# Altium PCB ch559.PcbDoc
Units mm, origin at the board's own origin, x right, y up, seen from the top; angles counter-clockwise.
Board outline 51.31 x 62.61 mm, 2 copper layers (Top Layer, Bottom Layer); 72 components, 55 nets, 249 pads, 124 vias.
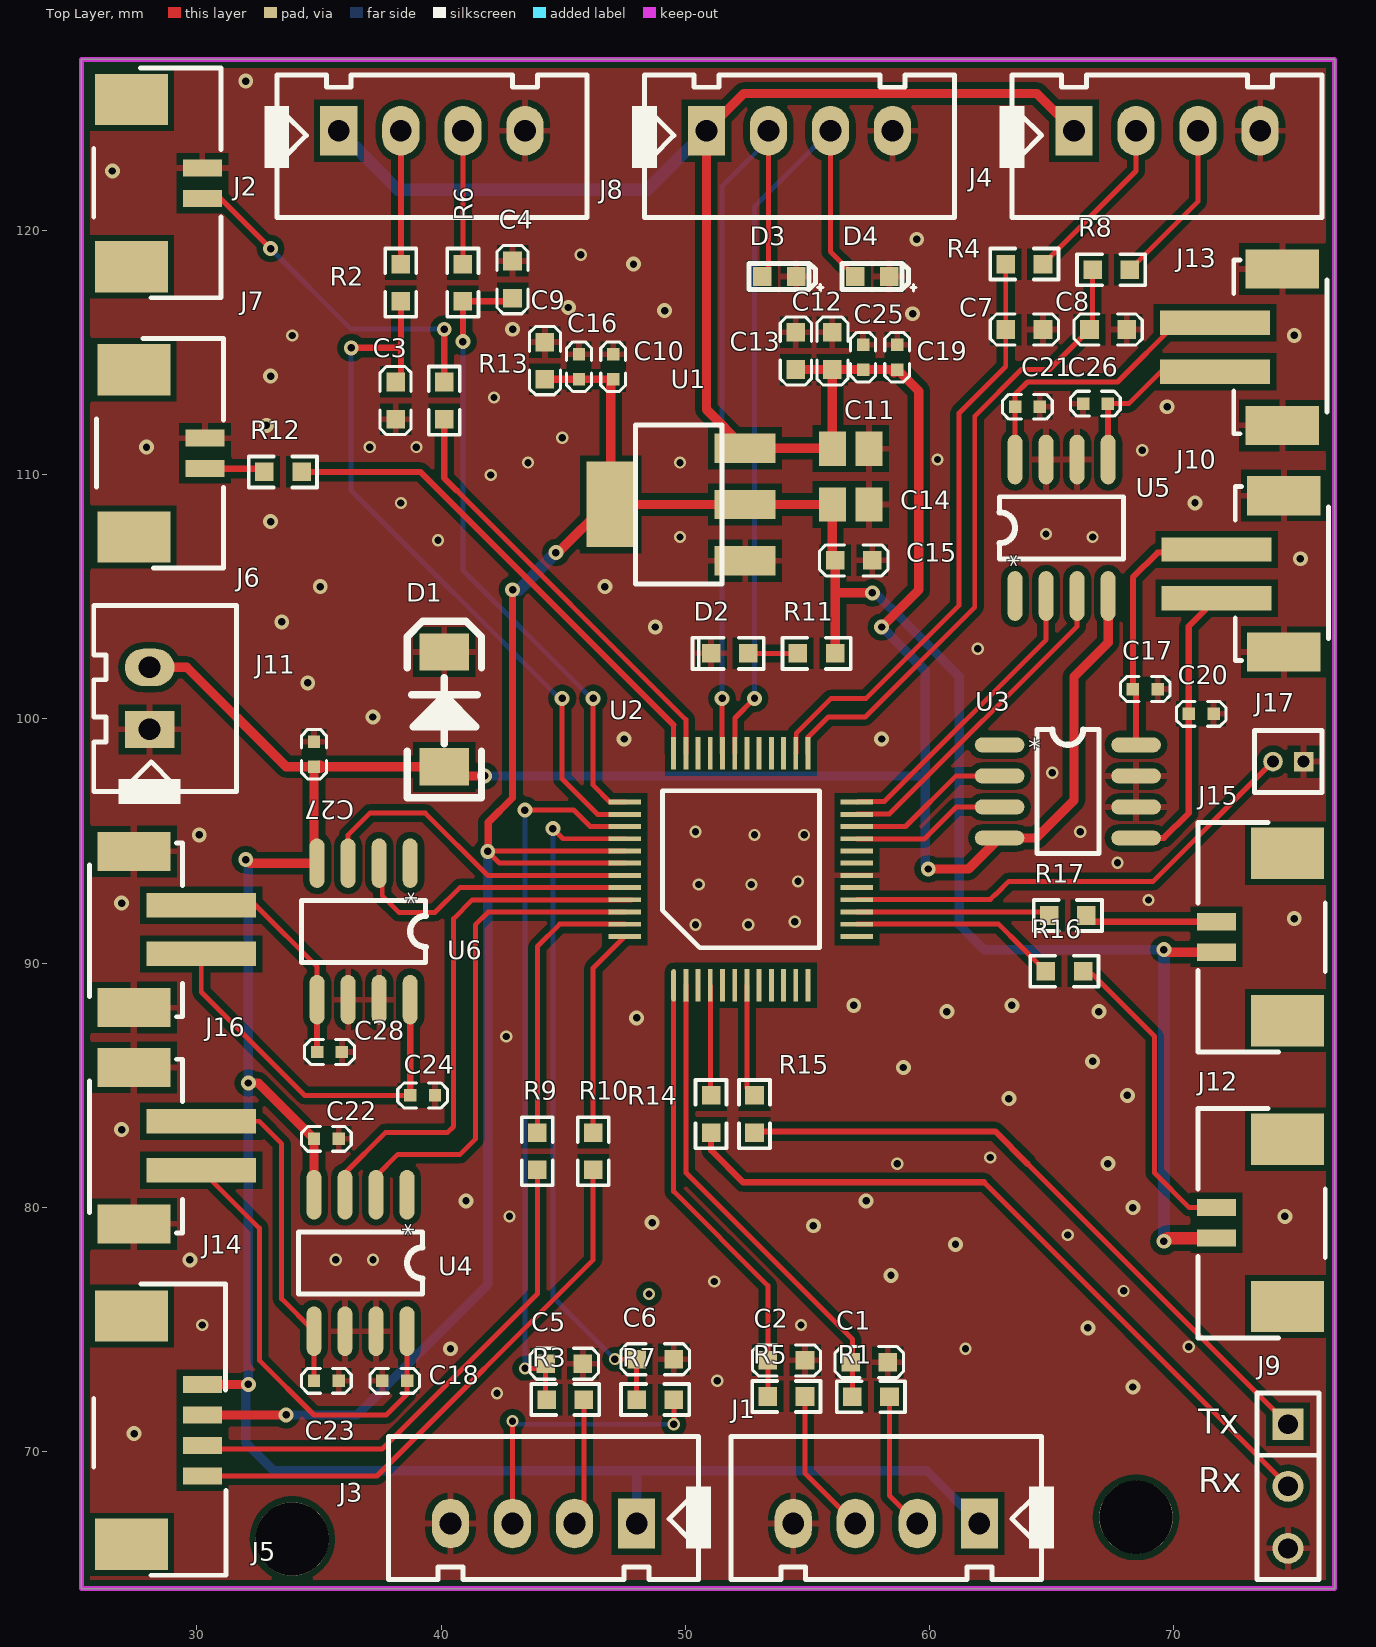
[diagram p0: Top Layer view]
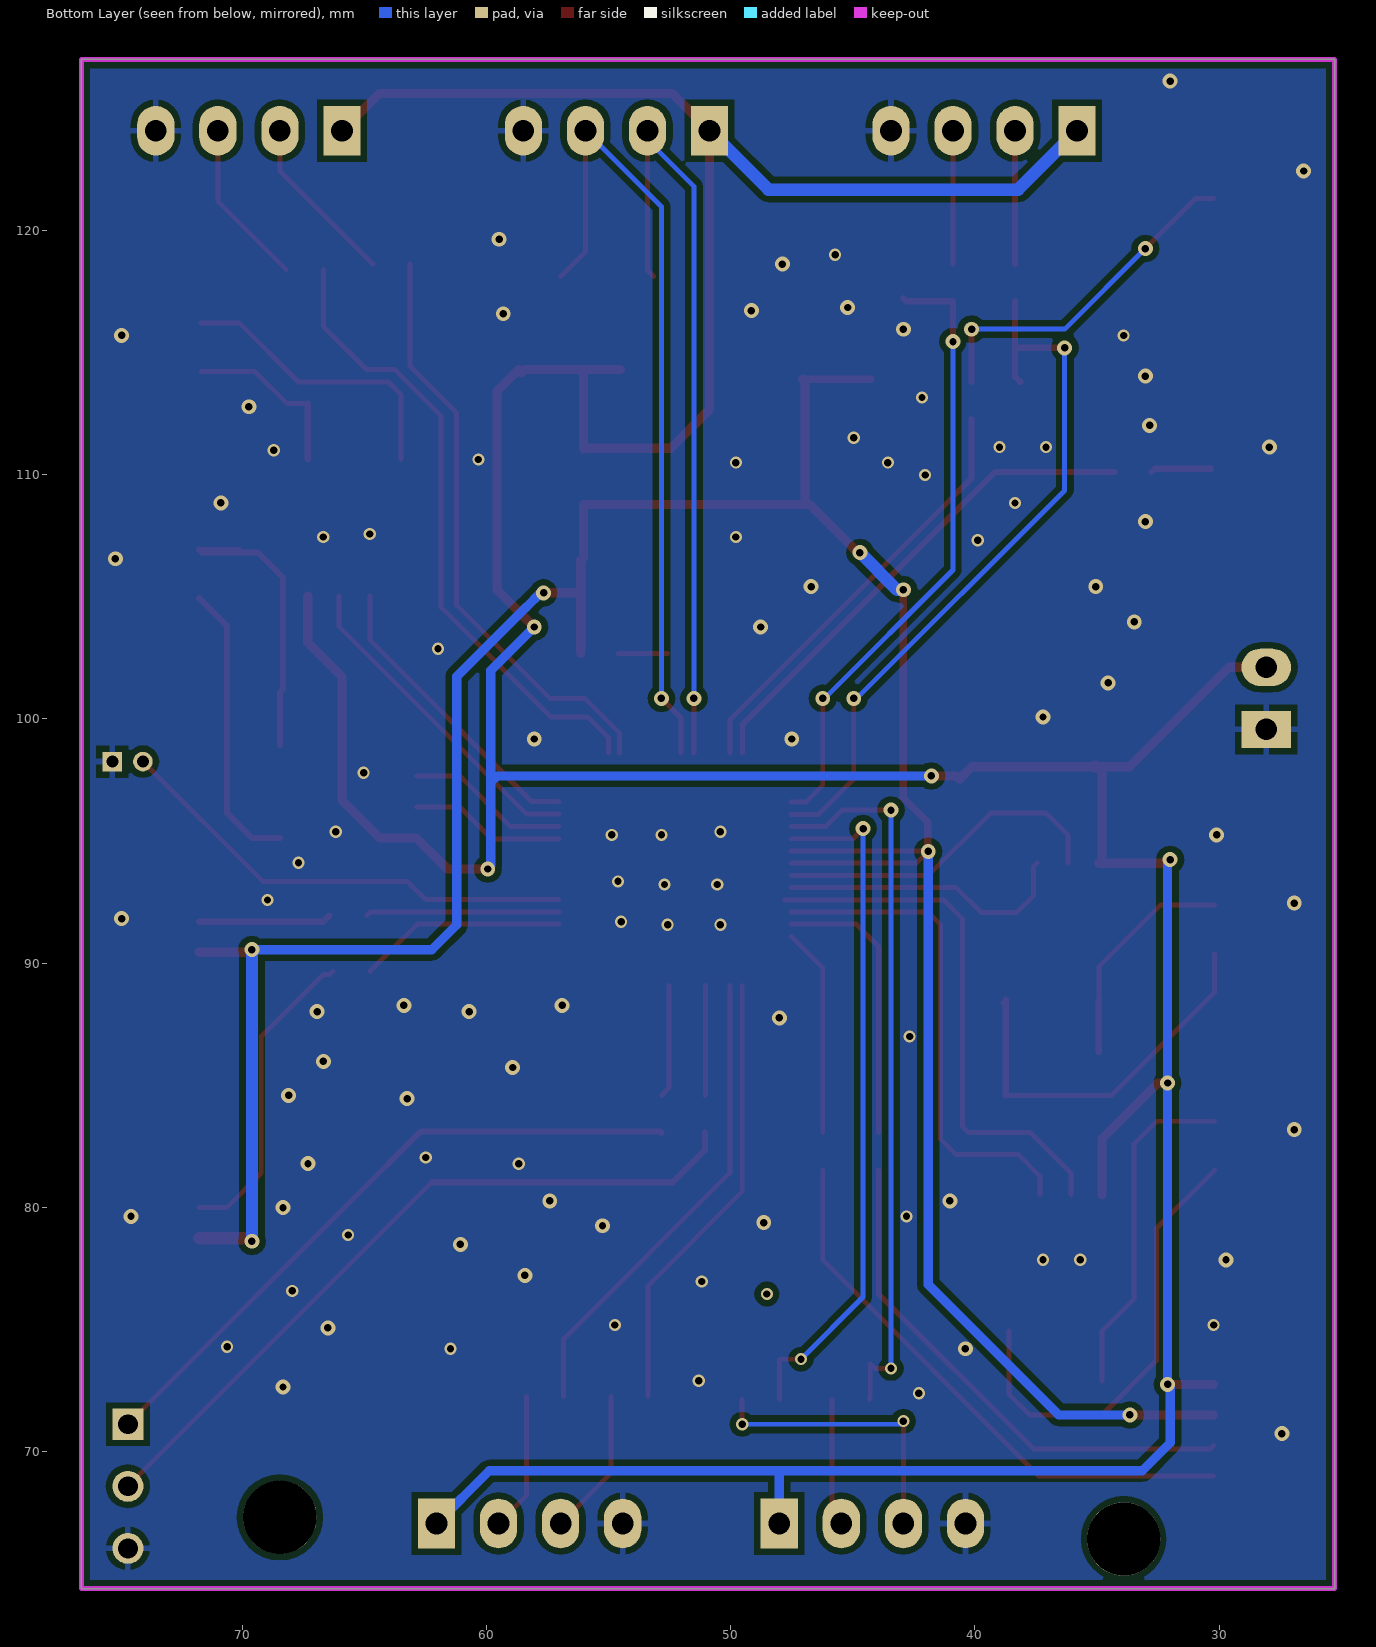
[diagram p1: Bottom Layer view, seen from below]
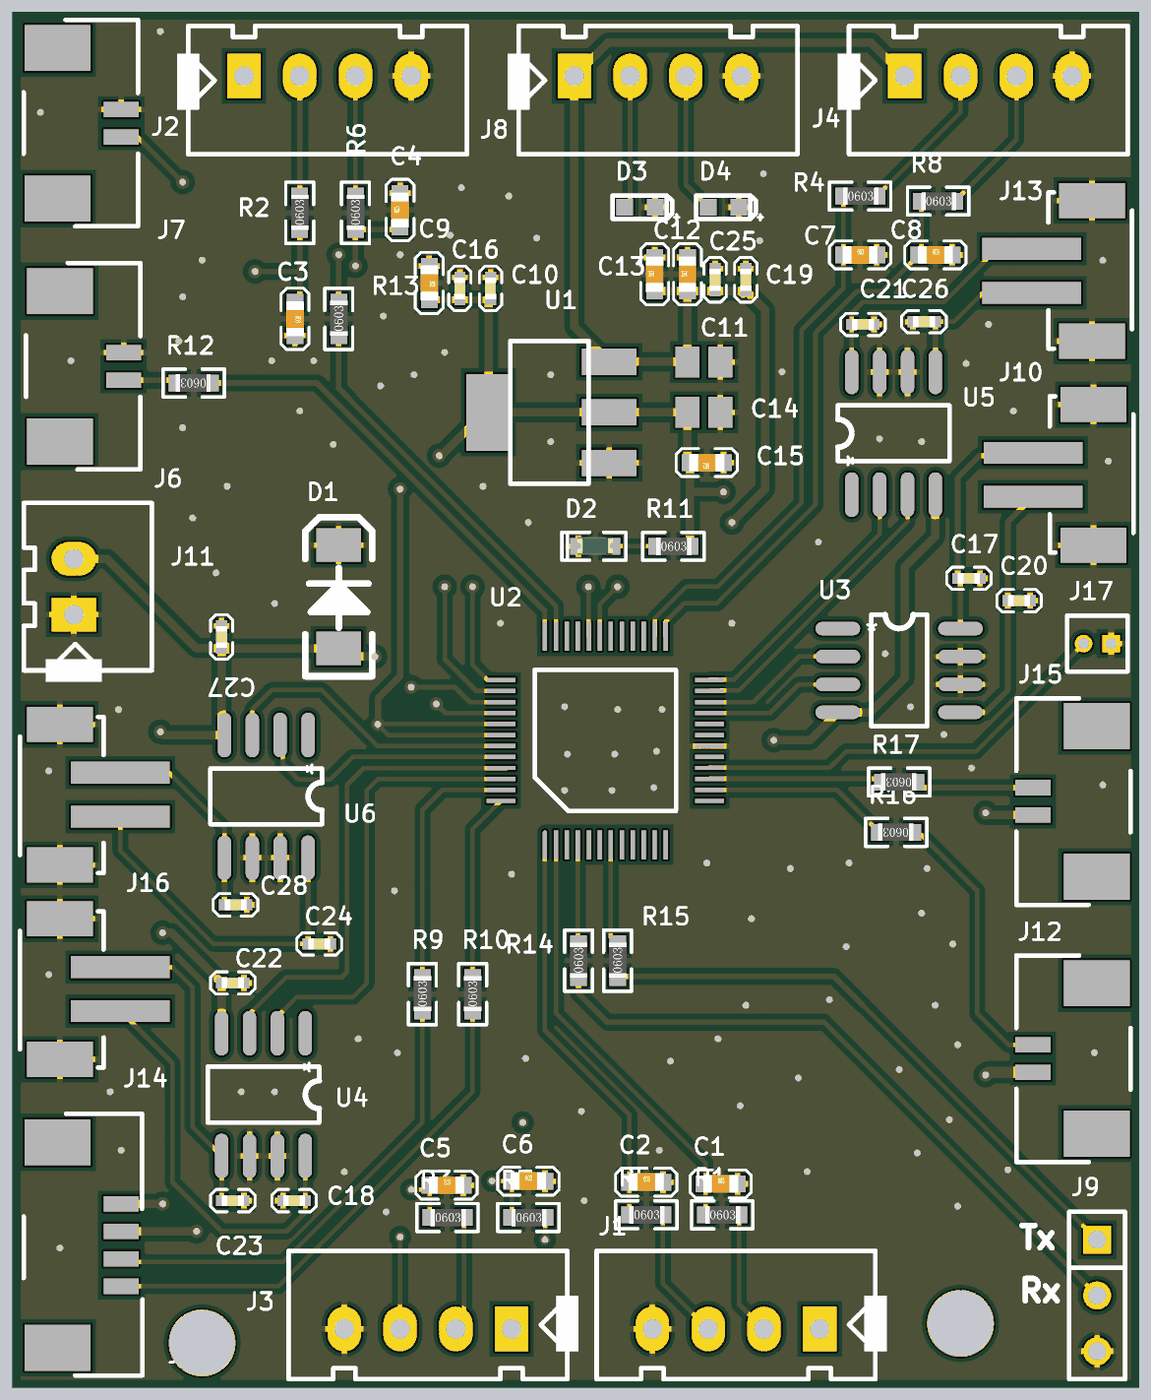
[diagram p2: 3D render of the assembled board from above, using the file's embedded part models]

## Layer stack, top to bottom
Top Solder: solder mask 0.0102, Solder Resist, Dk 3.5
Top Layer: signal copper 0.0356
Dielectric 1: dielectric 0.32, FR-4, Dk 4.8
Bottom Layer: signal copper 0.0356
Bottom Solder: solder mask 0.0102, Solder Resist, Dk 3.5

## Board outline
25.273,64.389 25.273,127 76.581,127 76.581,64.389

## Design rules (kind name [scope] priority, off if disabled: settings)
Clearance [All] p1: gap=0.254 ignorepadtopadclearanceinfootprint=FALSE except(0: Arc-Hole Track-Hole SMDPad-Hole THPad-Hole Via-Hole Fill-Hole Poly-Hole Region-Hole Text-Hole)
PolygonConnect PolygonConnect_1 [IsVia] p1: connectstyle=Direct reliefconductorwidth=0.254 reliefentries=4 polygonreliefangle="90 Angle" airgapwidth=0.254
PolygonConnect [All] p2: connectstyle=Relief reliefconductorwidth=0.254 reliefentries=4 polygonreliefangle="90 Angle" airgapwidth=0.254
RoutingVias [All] p1: holewidth=0.3 width=0.5 viastyle="Through Hole" minholewidth=0.3 minwidth=0.5 maxholewidth=0.5 maxwidth=0.8
SolderMaskExpansion [All] p1: expansion=0.102
Width Width_1 [InNetClass('IN')] p1: maxlimit=0.6 minlimit=0.203 preferedwidth=0.203
Width POW [InNetClass('pow')] p2: maxlimit=1.016 minlimit=0.203 preferedwidth=0.508
Width [All] p3: maxlimit=0.254 minlimit=0.203 preferedwidth=0.254
30 further rules are at their usual default settings.

## Classes and differential pairs
net class IN: INA1 INA2 INA3 INA4 INB1 INB2 INB3 INB4
net class pow: 3.3V_VCC 5V_VCC

## Components (designator, comment, footprint, x,y, rotation, side; value= is the part's Value field where it differs from the comment)
C1 "102K10V" C0603 56.769,73.66 r0 top
C2 "102K10V" C0603 53.378,73.737 r0 top
C3 "102K10V" C0603 38.14,113.792 r270 top
C4 "102K10V" C0603 42.926,117.221 r90 top
C5 "102K10V" C0603 44.283,73.597 r0 top
C6 "102K10V" C0603 48.006,73.781 r0 top
C7 "102K10V" C0603 63.119,115.938 r0 top
C8 "102K10V" C0603 66.548,115.938 r0 top
C9 "106K50V" C0603 44.252,115.426 r270 top
C10 "104J10V" C0402 47.046,114.924 r270 top
C11 "226M50V" C0805 56.769,111.061 r0 top
C12 "106K50V" C0603 56.019,114.3 r90 top
C13 "105K16V" C0603 54.523,114.3 r90 top
C14 "226M50V" C0805 56.769,108.775 r0 top
C15 "105K16V" C0603 57.658,106.489 r180 top
C16 "104J10V" C0402 45.649,113.908 r90 top
C17 "104J10V" C0402 69.342,101.219 r180 top
C18 "104J10V" C0402 37.592,72.898 r0 top
C19 "104J10V" C0402 58.674,114.3 r90 top
C20 "104J10V" C0402 70.612,100.203 r0 top
C21 "104J10V" C0402 64.516,112.776 r180 top
C22 "104J10V" C0402 34.798,82.804 r0 top
C23 "104J10V" C0402 34.798,72.898 r0 top
C24 "104J10V" C0402 39.751,84.582 r180 top
C25 "104J10V" C0402 57.277,114.3 r90 top
C26 "104J10V" C0402 67.301,112.903 r180 top
C27 "104J10V" C0402 34.798,98.044 r90 top
C28 "104J10V" C0402 34.925,86.36 r0 top
D1 "SMAJ5.0CA" DO-214 40.132,98.035 r90 top
D2 "LED0603G" D-LED0603G 52.578,102.679 r180 top
D3 "ESDA_TR1/0603" HS_0603D 53.848,118.11 r180 top
D4 "ESDA_TR1/0603" HS_0603D 57.658,118.11 r180 top
J1 "SH1.0-T-1-LT-4A_卧式" XH2.54-4P 62.039,67.056 r180 top
J2 "SH1.0-T-1-LT-4A_卧式" XH2.54-4P 35.814,124.079 r0 top
J3 "SH1.0-T-1-LT-4A_卧式" XH2.54-4P 48.006,67.056 r180 top
J4 "SH1.0-T-1-LT-4A_卧式" XH2.54-4P 65.913,124.079 r0 top
J5 "Header 4" "J-SH1.27 -4" 30.226,69.001 r90 top
J6 "XH1.27-2P" J-SH1.27-2 30.332,110.242 r90 top
J7 "XH1.27-2P" J-SH1.27-2 30.226,121.305 r90 top
J8 "Header 4" XH2.54-4P 50.863,124.079 r0 top
J9 "S2.54-3P" S2.54-3P 74.676,71.12 r270 top
J10 "SH1.0-T-1-LT-2A_卧式" J-SH2.0-T-1-LT-2A_立式 71.755,104.934 r90 top
J11 "XH1.25-2P" XH2.54-2p 28.067,99.568 r90 top
J12 "XH1.27-2P" J-SH1.27-2 71.755,79.99 r270 top
J13 "SH1.0-T-1-LT-2A_卧式" J-SH2.0-T-1-LT-2A_立式 71.692,114.214 r90 top
J14 "SH1.0-T-1-LT-2A_卧式" J-SH2.0-T-1-LT-2A_立式 30.182,83.525 r270 top
J15 "XH1.27-2P" J-SH1.27-2 71.755,91.694 r270 top
J16 "SH1.0-T-1-LT-2A_卧式" J-SH2.0-T-1-LT-2A_立式 30.182,92.374 r270 top
J17 "XH1.25-2P" S1.25-2P 75.311,98.251 r180 top
R1 "100R-1W" R0603 56.837,72.25 r0 top
R2 "100R-1W" R0603 38.354,117.094 r90 top
R3 "100R-1W" R0603 44.323,72.13 r0 top
R4 "100R-1W" R0603 63.119,118.618 r0 top
R5 "100R-1W" R0603 53.378,72.257 r0 top
R6 "100R-1W" R0603 40.894,117.094 r90 top
R7 "100R-1W" R0603 48.006,72.13 r0 top
R8 "100R-1W" R0603 66.675,118.389 r0 top
R9 "1k" R0603 43.942,81.534 r90 top
R10 "1k" R0603 46.228,81.534 r90 top
R11 "2K" R0603 54.61,102.679 r0 top
R12 "1k" R0603 34.29,110.109 r180 top
R13 "1k" R0603 40.132,112.268 r90 top
R14 "22R" R0603 51.054,83.058 r90 top
R15 "22R" R0603 52.832,83.058 r90 top
R16 "1k" R0603 66.285,89.662 r180 top
R17 "1k" R0603 66.421,91.948 r180 top
U1 "1117-3.3V" SOT-223 52.451,108.775 r90 top
U2 "CH559L" LQFP48 49.523,89.091 r90 top
U3 "PTC918" SO-8 62.865,98.933 r0 top
U4 "PTC918" SO-8 38.608,80.518 r270 top
U5 "PTC918" SO-8 63.5,105.029 r90 top
U6 "PTC918" SO-8 38.735,94.091 r270 top

## Footprints (in the part's own frame and the unit in brackets; to place one, negate y for a bottom-side part, rotate by r counter-clockwise, add the part's x,y. Pads: shape width x height; smd on the part's side, far side on the other; paste and mask are expansions set on the pad)
C0402 [mil]
  rect 20x20 smd: 1(0,0) 2(40,0)
  silkscreen extent -20,-20 60,20, body extent 0,-10 40,10, height 20
C0603 [mil]
  rect 30x30 smd: 1(0,0) 2(60,0)
  silkscreen extent -25,-25 85,25, body extent -1,-15 61,16, height 12
C0805 [mm] "Chip Capacitor, Body 2.0x1.3mm, IPC High Density"
  rect 1.1x1.4 smd: 1(-0.75,0) 2(0.75,0)
  body extent -1.1,-0.72 1.1,0.72, height 1.4
D-LED0603G [mil]
  rect 30x30 smd: 1(0,0) 2(60,0)
  silkscreen extent -25,-25 90,25, body extent -2,-16 62,15, height 24
DO-214 [mil]
  rect 60x80 smd: 1(0,0) 2(185,0)
  silkscreen extent -50,-60 235,60
HS_0603D [mil]
  rect 30x30 smd: 1(-27.5,0) 2(27.5,0)
  silkscreen extent -70,-21 49,23
"J-SH1.27 -4" [mm]
  rect 0.7x1.6 smd: 1(0,0) 2(1.25,0) 3(2.5,0) 4(3.75,0)
  rect 2.1x3 smd: 5(6.55,2.9) 6(-2.8,2.9)
  silkscreen extent -4.06,-0.96 7.85,4.44
J-SH1.27-2 [mm]
  rect 0.7x1.6 smd: 1(0,0) 2(1.25,0)
  rect 2.1x3 smd: 3(4.05,2.9) 4(-2.8,2.9)
  silkscreen extent -4.06,-0.76 5.33,4.44
J-SH2.0-T-1-LT-2A_立式 [mm]
  rect 1x4.5 smd: 1(0,0) 2(2,0)
  rect 1.6x3 smd: 3(-2.2,-2.75) 4(4.2,-2.75)
  silkscreen extent -2.54,-4.57 4.57,-0.76
LQFP48 [mm]
  oval 1.321x0.2 smd: 1(0,0)
  rect 1.321x0.2 smd: 2(0,-0.5) 3(0,-1) 4(0,-1.5) 5(0,-2) 6(0,-2.5) 7(0,-3) 8(0,-3.5) 9(0,-4) 10(0,-4.5) 11(0,-5) 12(0,-5.5) 25(9.5,-5.5) 26(9.5,-5) 27(9.5,-4.5) 28(9.5,-4) 29(9.5,-3.5) 30(9.5,-3) 31(9.5,-2.5) 32(9.5,-2) 33(9.5,-1.5) 34(9.5,-1) 35(9.5,-0.5) 36(9.5,0)
  rect 0.2x1.321 smd: 13(2,-7.5) 14(2.5,-7.5) 15(3,-7.5) 16(3.5,-7.5) 17(4,-7.5) 18(4.5,-7.5) 19(5,-7.5) 20(5.5,-7.5) 21(6,-7.5) 22(6.5,-7.5) 23(7,-7.5) 24(7.5,-7.5) 37(7.5,2) 38(7,2) 39(6.5,2) 40(6,2) 41(5.5,2) 42(5,2) 43(4.5,2) 44(4,2) 45(3.5,2) 46(3,2) 47(2.5,2) 48(2,2)
  silkscreen extent 1.54,-5.96 7.96,0.47
R0603 [mil]
  rect 30x30 smd: 1(0,0) 2(60,0)
  silkscreen extent -25,-25 85,25, body extent 0,-16 62,15, height 18
S1.25-2P [mm]
  rect 0.8x0.8 hole 0.5: 1(0,0)
  round 0.8 hole 0.5: 2(1.25,0)
  silkscreen extent -0.75,-1.27 2,1.27, body extent -0.41,-0.41 0.39,0.39, height 8
S2.54-3P [mil] "P-SIP5"
  rect 50x50 hole 32: 1(0,0)
  round 50 hole 32: 2(100,0) 3(200,0)
  silkscreen extent -50,-50 250,50, body extent -50,-50 250,50, height 315
SO-8 [mil]
  oval 80x24 smd: 1(0,0) 2(0,-50) 3(0,-100) 4(0,-150) 5(220,-150) 6(220,-100) 7(220,-50) 8(220,0)
  silkscreen extent 60,-175 160,25
SOT-223 [mm]
  rect 1.2x2.5 smd: 1(-2.3,0) 2(0,0) 3(2.3,0)
  rect 3.5x2 smd: 2(0,5.5)
  silkscreen extent -3.25,0.94 3.25,4.5
XH2.54-2p [mil]
  rect 60x80 hole 35: 1(0,0)
  oval 60x80 hole 35: 2(100,0)
  silkscreen extent -120,-140 200,90, body extent -100,-140 200,90, height 256
XH2.54-4P [mil]
  rect 60x80 hole 35: 1(0,0)
  oval 60x80 hole 35: 2(100,0) 3(200,0) 4(300,0)
  silkscreen extent -120,-140 400,90, body extent -100,-140 400,90, height 256

## Part data
C1 C2 C3 C4 C5 C6 C7 C8: library part C0603X7R-102K10V, "贴片电容-陶瓷"
C9 C12: library part C0603X7R-106K50V, "贴片电容-陶瓷"
C10 C16 C17 C18 C19 C20 C21 C22 C23 C24 C25 C26 C27 C28: library part C0402X7R-104J10V, "贴片电容-陶瓷"
C11 C14: library part C0805Y5V-226M50V, "贴片电容-陶瓷"
C13 C15: library part C0603X7R-105K16V, "贴片电容-陶瓷"
D2: library part DLED-0603-G, "贴片二极管-LED"
D3 D4: library part "D Zener", "Zener Diode"
J5 J8: "Header, 4-Pin"
J6 J7 J12 J15: library part J-XH1.27-2P, "接插件-1.27"
J9: library part J-S2.54-3P, "单排排针-直针"
J11: library part J-XH2.54-2P_1, "接插件-2.54"
J17: library part J-XH2.54-2P, "接插件-2.54"
R1 R2 R3 R4 R5 R6 R7 R8: library part R1-100R, "插件电阻-碳膜"
R9 R10 R11 R12 R13 R14 R15 R16 R17: library part R0603-100RF, "贴片电阻-通用"
U1: library part "AP1117-33 SOT-223", "芯片 电源类"
U2: "单片机"
U3 U4 U5 U6: "马达驱动芯片"

## Free pads (board coordinates)
  round 3 hole 3: 2(33.909,66.421) 2(68.453,67.31)

## Via types
v1: diameter 0.61, hole 0.305, Top Layer to Bottom Layer, tented both sides, 74 vias
v2: diameter 0.5, hole 0.3, Top Layer to Bottom Layer, tented both sides, 50 vias

## Nets (pads, with @x,y where several pads share a name; then routed paths per layer and width w, separated by ;. In a path a pad name is that pad's centre, name@x,y a point inside that pad or via, vN(x,y) a via of type N, cw(c..) or ccw(c..) an arc to the next point about the centre after c; other vN are vias at no path point)
3.3V_VCC: C9.2 C10.2 C14.1 C15.2 C16.1 J5.3 J12.2 J15.2 R11.2 U1.2 U2.41 U2.42 | length 124.4
  Top Layer w0.203: v1@41.927,94.591 U2.41 ; v1@42.047,94.437 42.393,94.091 U2.42
  Top Layer w0.3: v1(41.91,94.574) 41.927,94.591 41.927,95.761 42.926,96.76 v1(42.926,105.283) ; C9.2 C10.2@47.04,113.902
  Top Layer w0.381: J5.3 v1(33.655,71.501) ; v1(44.704,106.807) 44.791,106.807 46.76,108.775 U1.2@46.951,108.775 ; C10.2@47.04,113.902 46.951,113.813 U1.2@46.951,108.775 ; R11.2 56.134,105.156 ; v1(57.658,105.156) 56.134,105.156 ; v1(69.596,90.551) 69.703,90.444 J15.2 ; U1.2@46.951,108.775 52.451,108.775 C14.1 56.019,106.604 C15.2 56.134,105.156
  Top Layer w0.508: v1(69.596,78.613) 69.723,78.74 J12.2
  Bottom Layer w0.381: v1(33.655,71.501) 36.57,71.501 41.91,76.841 v1(41.91,94.574) ; v1(57.658,105.156) 57.779,105.156 58.363,104.572 58.376,104.572 61.214,101.733 61.214,91.567 62.23,90.551 v1(69.596,90.551)
  Bottom Layer w0.508: v1(42.926,105.283) 43.18,105.283 v1(44.704,106.807) ; v1(69.596,78.613) v1(69.596,90.551)
5V_VCC: C11.1 C12.1 C13.1 C19.1 C22.1 C25.1 C27.1 D1.1 J1.1 J2.1 J3.1 J4.1 J5.4 J8.1 J11.2 U1.3 U3.4 U4.4 U5.4 U6.4 | length 202.5
  Top Layer w0.381: J11.2 29.591,102.108 33.655,98.044 C27.1 ; J5.4 v1(32.111,72.751) ; v1(32.004,94.234) 32.147,94.091 U6.4 34.798,94.218 C27.1 ; v1(32.111,85.09) 32.512,85.09 C22.1 U4.4 ; 35.052,98.044 C27.1 ; 35.061,98.035 D1.1 40.631,97.536 40.758,97.663 v1(41.783,97.663) ; C13.1 C12.1 ; v1(58.039,103.759) 59.563,105.283 59.563,113.411 C19.1 58.547,114.173 58.42,114.3 C25.1 C12.1 ; v1(59.944,93.853) 61.595,93.853 U3.4 64.366,95.123 65.913,96.67 65.913,101.727 67.31,103.124 U5.4 ; J4.1 64.389,125.603 52.387,125.603 J8.1 50.863,112.663 U1.3 56.005,111.075 C11.1 C12.1
  Top Layer w0.508: 35.052,98.044 35.061,98.035
  Bottom Layer w0.381: v1(32.004,94.234) 32.111,94.127 v1(32.111,85.09) v1(32.111,72.751) 32.004,72.644 32.004,70.358 33.147,69.215 48.006,69.215 ; v1(41.783,97.663) 59.563,97.663 59.817,97.409 ; J3.1 48.006,69.215 ; v1(58.039,103.759) 59.817,101.981 59.817,97.409 ; v1(59.944,93.853) 59.817,93.98 59.817,97.409 ; J1.1 59.88,69.215 48.006,69.215
  Bottom Layer w0.508: J2.1 38.227,121.666 48.45,121.666 J8.1
DM: D3.2 J8.2 U2.32 | length 32.5
  Top Layer w0.203: v1(51.504,100.838) 51.504,98.61 U2.32 ; D3.2 53.404,118.364 J8.2
  Bottom Layer w0.203: v1(51.504,100.838) 51.504,121.799 53.594,123.888 J8.2
DP: D4.2 J8.3 U2.31 | length 33.5
  Top Layer w0.203: U2.31@52.031,98.591 52.031,100.037 v1(52.832,100.838) ; J8.3 55.944,119.126 D4.2
  Bottom Layer w0.203: v1(52.832,100.838) 52.832,120.968 J8.3
GND: C1.2 C2.2 C3.2 C4.2 C5.2 C6.2 C7.2 C8.2 C9.1 C10.1 C11.2 C12.2 C13.2 C14.2 C15.1 C16.2 C17.1 C18.1 C19.2 C20.2 C21.1 C22.2 C23.2 C24.1 C25.2 C26.2 C27.2 C28.2 D1.2 D2.2 D3.1 D4.1 J1.4 J2.4 J3.4 J4.4 J6.2 J7.2 J8.4 J9.3 J10.3 J10.4 J11.1 J13.3 J13.4 J14.3 J14.4 J16.3 J16.4 J17.1 U1.1 U2.18 U3.6 U3.7 U4.6 U4.7 U5.6 U5.7 U6.6 U6.7
  other v1: 27.432,70.739 68.326,72.644 40.386,74.212 66.484,75.063 58.42,77.216 29.718,77.851 61.061,78.486 55.245,79.248 48.641,79.375 74.549,79.629 68.326,79.99 41.021,80.264 57.404,80.264 67.301,81.788 26.924,83.185 63.246,84.455 68.097,84.582 58.928,85.725 66.675,85.979 48.006,87.757 60.706,88.011 66.929,88.011 56.896,88.265 63.373,88.265 74.93,91.821 26.924,92.456 30.099,95.25 47.496,99.173 58.039,99.173 37.211,100.076 34.544,101.473 48.768,103.759 33.477,103.969 35.052,105.41 46.705,105.41 75.184,106.553 33.02,108.077 70.866,108.839 27.94,111.125 32.848,112.014 69.723,112.776 33.02,114.033 74.93,115.697 42.926,115.951 59.309,116.586 49.149,116.713 45.212,116.84 47.879,118.618 59.474,119.634 26.543,122.428 32.004,126.111
  other v2: 42.291,72.39 51.308,72.898 61.468,74.212 70.612,74.295 30.226,75.184 54.737,75.184 67.945,76.581 51.181,76.962 35.687,77.851 37.211,77.851 65.659,78.867 42.799,79.629 58.674,81.788 62.484,82.042 42.672,86.995 50.419,91.567 52.578,91.567 54.483,91.694 68.961,92.583 50.546,93.218 52.705,93.218 54.61,93.345 67.691,94.107 52.832,95.25 54.864,95.25 50.419,95.377 66.167,95.377 65.024,97.79 61.976,102.87 39.878,107.315 49.784,107.442 66.675,107.442 64.77,107.569 38.354,108.839 42.037,109.982 43.561,110.49 49.784,110.49 60.325,110.617 68.707,110.998 37.084,111.125 38.989,111.125 44.958,111.506 42.164,113.157 33.909,115.697 45.72,118.999
INA1: U2.46 U4.2 | length 20.6
  Top Layer w0.203: U4.2 37.338,81.28 38.227,82.169 40.781,82.169 41.402,82.79 41.402,91.567 41.926,92.091 U2.46
INA2: U2.44 U6.2 | length 12
  Top Layer w0.203: U6.2 37.592,93.964 37.592,92.755 38.272,92.075 39.751,92.075 40.767,93.091 U2.44
INA3: U2.22 U3.2 | length 6.7
  Top Layer w0.203: U2.22 59.015,95.591 61.087,97.663 U3.2
INA4: U2.24 U5.2 | length 12.3
  Top Layer w0.203: U2.24 57.05,96.618 58.151,96.618 64.77,103.237 U5.2
INB1: U2.45 U4.3 | length 22.2
  Top Layer w0.203: U4.3 36.068,81.407 37.719,83.058 40.259,83.058 40.513,83.312 40.513,91.821 41.281,92.589 U2.45@47.799,92.589
INB2: U2.43 U6.3 | length 13.9
  Top Layer w0.203: U6.3 36.195,95.25 37.084,96.139 39.354,96.139 41.902,93.591 U2.43
INB3: U2.21 U3.3 | length 6.4
  Top Layer w0.203: U2.21@57.023,95.083 59.777,95.083 61.087,96.393 U3.3
INB4: U2.23 U5.3 | length 13.4
  Top Layer w0.203: U2.23@57.023,96.11 58.361,96.11 66.04,103.789 U5.3
NetD2_1: D2.1 R11.1 | length 2
  Top Layer w0.203: D2.1 R11.1
NetJ1_2: J1.2 R1.2 | length 5.7
  Top Layer w0.203: R1.2 58.361,68.195 J1.2
NetJ1_3: J1.3 R5.2 | length 6.1
  Top Layer w0.203: R5.2 54.902,69.114 J1.3
NetJ2_2: J2.2 R2.2 | length 5.5
  Top Layer w0.254: R2.2 J2.2
NetJ2_3: J2.3 R6.2 | length 5.5
  Top Layer w0.203: R6.2 J2.3
NetJ3_2: J3.2 R3.2 | length 5.2
  Top Layer w0.203: J3.2 45.847,67.437 R3.2
NetJ3_3: J3.3 R7.2 | length 11.9
  Top Layer w0.203: J3.3 v2(42.926,71.247) ; v2(49.523,71.12) 49.53,71.12 R7.2
  Bottom Layer w0.203: v2(42.926,71.247) 43.053,71.12 v2(49.523,71.12)
NetJ4_2: J4.2 R4.2 | length 7
  Top Layer w0.203: R4.2 68.453,122.428 J4.2
NetJ4_3: J4.3 R8.2 | length 6.8
  Top Layer w0.203: R8.2 70.993,121.183 J4.3
NetJ5_1: J5.1 R10.1 | length 23.4
  Top Layer w0.203: J5.1 37.378,69.001 46.228,77.851 R10.1
NetJ5_2: J5.2 R9.1 | length 21.5
  Top Layer w0.203: J5.2 30.373,70.104 37.592,70.104 43.942,76.454 R9.1
NetJ6_1: J6.1 R12.2 | length 2.5
  Top Layer w0.254: J6.1 32.633,110.242 R12.2
NetJ7_1: J7.1 R13.2 | length 14.3
  Top Layer w0.203: J7.1 30.968,121.305 v1(33.02,119.253)
  Top Layer w0.254: R13.2 v1(40.132,115.951)
  Bottom Layer w0.203: v1(33.02,119.253) 36.322,115.951 v1(40.132,115.951)
NetJ9_1: J9.1 R15.1 | length 26.8
  Top Layer w0.203: 64.008,81.788 J9.1
  Top Layer w0.254: R15.1 52.883,83.109 62.687,83.109 64.008,81.788
NetJ9_2: J9.2 R14.1 | length 30
  Top Layer w0.203: 62.23,81.026 J9.2
  Top Layer w0.254: R14.1 51.054,82.334 52.362,81.026 62.23,81.026
NetJ12_1: J12.1 R16.1 | length 12.8
  Top Layer w0.203: R16.1 66.412,89.535 66.675,89.535 69.215,86.995 69.215,81.407 70.632,79.99 J12.1
NetJ15_1: J15.1 R17.1 | length 5.4
  Top Layer w0.254: R17.1 66.675,91.694 J15.1
NetJ17_2: J17.2 U2.16 | length 19.4
  Top Layer w0.203: U2.16@57.023,92.607 62.488,92.607 62.718,92.837 62.738,92.837 63.246,93.345 69.155,93.345 J17.2
NetR9_2: R9.2 U2.47 | length 11.6
  Top Layer w0.203: R9.2 43.942,90.678 44.855,91.591 U2.47
NetR10_2: R10.2 U2.48 | length 8.6
  Top Layer w0.203: R10.2 46.228,89.796 U2.48
NetR12_1: R12.1 U2.36 | length 20.7
  Top Layer w0.203: U2.36@49.515,98.591 49.515,99.75
  Top Layer w0.254: R12.1 39.156,110.109 49.515,99.75
NetR13_1: R13.1 U2.35 | length 17.8
  Top Layer w0.203: 40.64,109.347 50.023,99.964 U2.35
  Top Layer w0.254: R13.1 40.132,109.855 40.64,109.347
NetR14_2: R14.2 U2.4 | length 4.5
  Top Layer w0.203: U2.4 51.023,84.613 R14.2
NetR15_2: R15.2 U2.7 | length 4.6
  Top Layer w0.203: U2.7 52.523,84.891 R15.2
NetR16_2: R16.2 U2.14 | length 8.5
  Top Layer w0.203: U2.14 62.832,91.591 63.745,90.678 R16.2
NetR17_2: R17.2 U2.15 | length 7.9
  Top Layer w0.203: U2.15@57.023,92.099 64.746,92.099 R17.2
OUTA1: C18.2 J14.2 U4.8 | length 18.7
  Top Layer w0.203: J14.2 32.562,79.145 32.562,73.737 34.798,71.501 37.759,71.501 38.608,72.35 C18.2 U4.8
OUTA2: C24.2 J16.2 U6.8 | length 16
  Top Layer w0.203: J16.2 30.182,88.817 34.417,84.582 C24.2 ; U6.8 U6.8@38.862,88.376
  Top Layer w0.254: C24.2 U6.8
OUTA3: C17.2 J10.2 U3.8 | length 12.5
  Top Layer w0.203: J10.2@70.104,106.934 J10.2
  Top Layer w0.254: U3.8 68.453,101.092 C17.2 68.326,105.791 69.342,106.807 71.628,106.807 J10.2
OUTA4: C21.2 J13.2 U5.8 | length 12.1
  Top Layer w0.203: U5.8 C21.2 63.5,113.284 64.008,113.792 67.691,113.792 70.113,116.214 J13.2
OUTB1: C23.1 J14.1 U4.5 | length 13.9
  Top Layer w0.203: J14.1 32.553,83.525 33.477,82.601 33.477,76.251 U4.5 C23.1
OUTB2: C28.1 J16.1 U6.5 | length 9.3
  Top Layer w0.203: J16.1 32.404,92.374 34.925,89.852 U6.5
  Top Layer w0.254: C28.1 U6.5
OUTB3: C20.1 J10.1 U3.5 | length 11.8
  Top Layer w0.254: U3.5 69.596,95.123 70.612,96.139 C20.1 70.612,103.791 J10.1
OUTB4: C26.1 J13.1 U5.5 | length 7.2
  Top Layer w0.203: C26.1 68.158,112.903 69.469,114.214 J13.1
  Top Layer w0.254: C26.1 67.31,112.894 U5.5
P00: C6.1 R7.1 U2.40 | length 28.4
  Top Layer w0.203: v1(44.577,95.504) 44.99,95.091 U2.40 ; v2(47.117,73.787) 47.123,73.781 C6.1 R7.1
  Bottom Layer w0.203: v1(44.577,95.504) 44.577,76.327 v2(47.117,73.787)
P01: C5.1 R3.1 U2.39 | length 29.6
  Top Layer w0.203: v2(43.434,73.406) 44.092,73.406 C5.1 44.283,72.17 R3.1 ; v1(43.434,96.266) 45.426,96.266 46.101,95.591 U2.39
  Bottom Layer w0.203: v2(43.434,73.406) v1(43.434,96.266)
P02: C3.1 R2.1 U2.38 | length 29.9
  Top Layer w0.203: v1(44.958,100.838) 44.958,97.536 46.403,96.091 U2.38
  Top Layer w0.254: v1(36.322,115.189) 38.354,115.189 ; C3.1 38.354,114.006 38.354,115.189 ; R2.1 38.354,115.189
  Bottom Layer w0.203: v1(36.322,115.189) 36.322,109.351 44.835,100.838 v1(44.958,100.838)
P03: C4.1 R6.1 U2.37 | length 25.7
  Top Layer w0.203: v1(46.228,100.838) 46.228,97.282 46.919,96.591 U2.37
  Top Layer w0.254: v1(40.894,115.443) R6.1 42.799,117.094 C4.1
  Bottom Layer w0.203: v1(40.894,115.443) 40.894,106.091 46.147,100.838 v1(46.228,100.838)
P16: C2.1 R5.1 U2.1 | length 18.4
  Top Layer w0.203: U2.1 49.523,80.652 53.378,76.797 C2.1 R5.1
P17: C1.1 R1.1 U2.2 | length 19.7
  Top Layer w0.203: U2.2@50.031,89.091 50.031,81.414 56.837,74.608 R1.1
P24: C8.1 R8.1 U2.25 | length 26.2
  Top Layer w0.203: U2.25@54.999,98.591 54.999,99.22 55.855,100.076 57.36,100.076 61.849,104.565 61.849,112.395 63.754,114.3 64.91,114.3 C8.1 66.675,116.065 R8.1
P25: C7.1 R4.1 U2.26 | length 24.4
  Top Layer w0.203: U2.26 54.542,98.61 54.542,99.409 55.971,100.838 57.404,100.838 61.214,104.648 61.214,112.522 63.119,114.427 C7.1 R4.1
pads on no net: J5.5 J5.6 J6.3 J6.4 J7.3 J7.4 J12.3 J12.4 J15.3 J15.4 U2.3 U2.5 U2.6 U2.8 U2.9 U2.10 U2.11 U2.12 U2.13 U2.17 U2.19 U2.20 U2.27 U2.28 U2.29 U2.30 U2.33 U2.34 U3.1 U4.1 U5.1 U6.1
copper on no net:
  other v2: 48.514,76.454

## Polygon pours and split planes (outlines as drawn)
GND on Top Layer "Top Layer-No Net" (solid, pour order 2): 20.193,121.412
GND on Top Layer "Top Layer-No Net 1" (solid, remove dead copper, pour order 0): 25.273,127 25.527,127.254 77.089,127.254 77.089,63.881 76.962,64.008 24.892,64.008 24.892,127.508 25.146,127.762
GND on Bottom Layer "Bottom Layer-No Net" (solid, remove dead copper, pour order 6): 21.336,122.555
GND on Bottom Layer "Bottom Layer-No Net 1" (solid, remove dead copper, pour order 4): 25.019,126.619 76.327,126.619 76.327,64.389 76.2,64.262 25.019,64.262

## Keep-outs
Keep-Out Layer:
  the board outline again, w0.203

## Silkscreen, mask and mechanical layers (free items; w line width, h text height)
Top Overlay:
  text "Tx" at 70.993,70.739 h1.02
  text "Rx" at 70.993,68.326 h1.02

## Dimensions
25.273,127.635 to 76.581,128.27 on Keep-Out Layer
24.638,127 to 24.638,64.389 on Keep-Out Layer

## Text inside footprints (layer, text, board x,y; h text height)
U3: Top Overlay "*" at 64.033,98.45 h0.76
U4: Top Overlay "*" at 38.125,79.35 h0.76 r270
U5: Top Overlay "*" at 63.983,106.197 h0.76 r90
U6: Top Overlay "*" at 38.252,92.923 h0.76 r270